# Altium PCB jlink072.PcbDoc
Units mm, origin at the board's own origin, x right, y up, seen from the top; angles counter-clockwise.
Board outline 41.1 x 18 mm, 2 copper layers (Top Layer, Bottom Layer), stack 1.571 mm thick; 26 components, 25 nets, 114 pads, 16 vias.
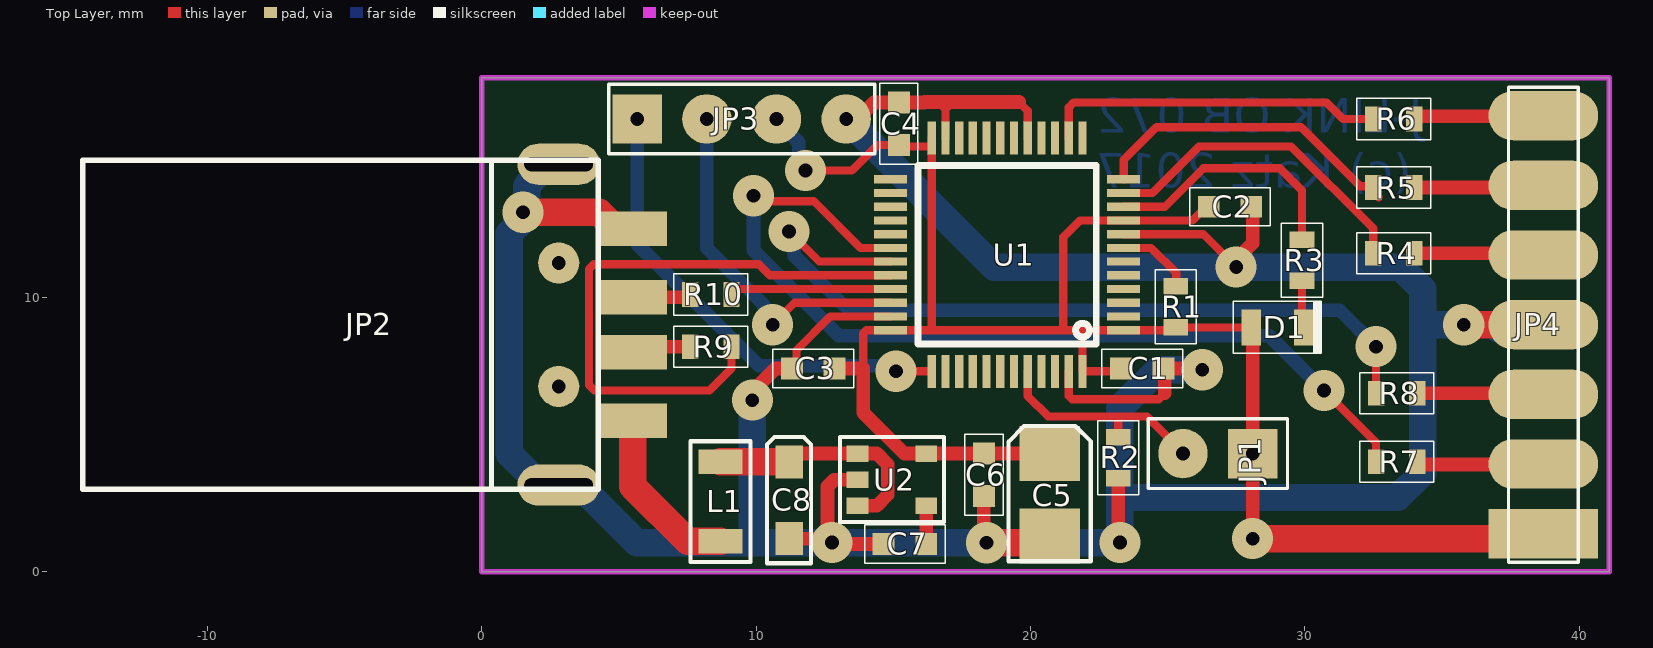
[diagram p0: Top Layer view]
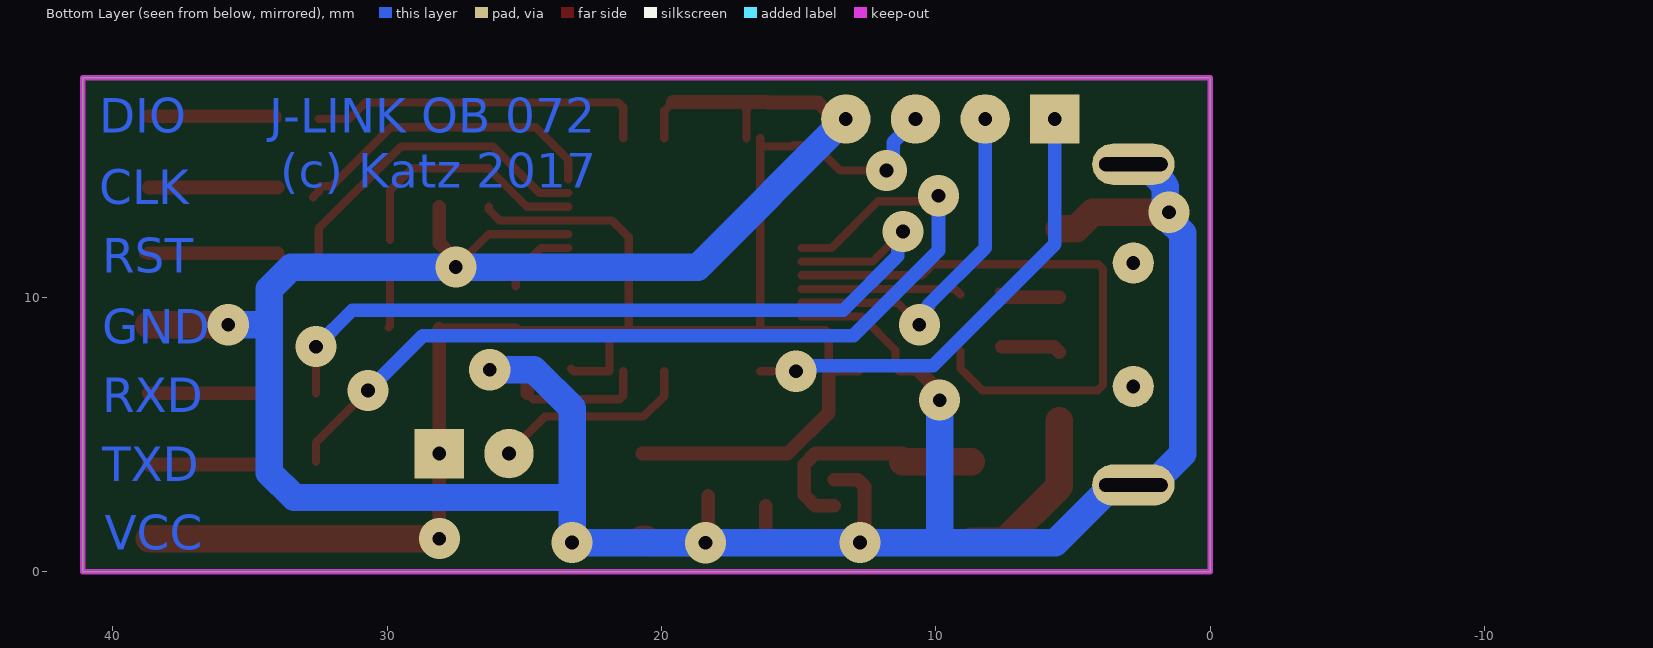
[diagram p1: Bottom Layer view, seen from below]
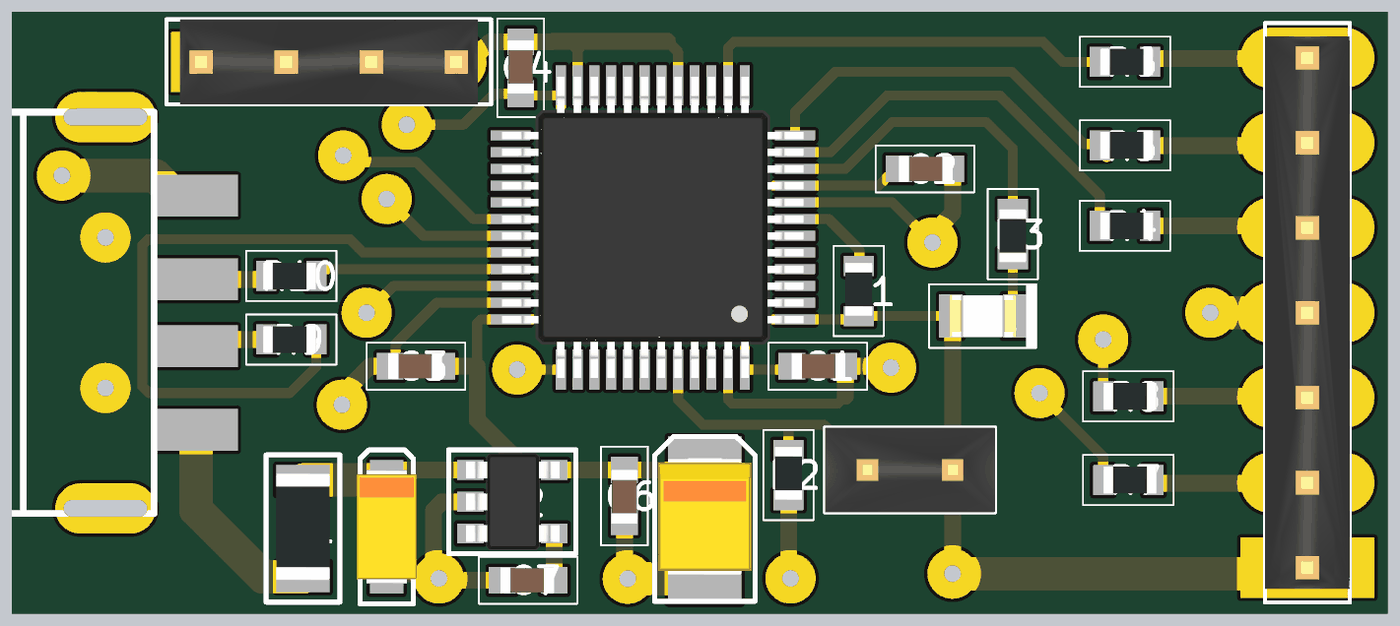
[diagram p2: 3D render of the assembled board from above, using the file's embedded part models]

## Layer stack, top to bottom
Top Solder: solder mask 0.0102, Solder Resist, Dk 3.5
Top Layer: signal copper 0.0356
Dielectric 1: dielectric 1.5, FR-4, Dk 4.8
Bottom Layer: signal copper 0.0356
Bottom Solder: solder mask 0.0102, Solder Resist, Dk 3.5

## Board outline
0,0 0,18 41.1,18 41.1,0

## Design rules (kind name [scope] priority, off if disabled: settings)
Clearance Clearance_2 [InNamedPolygon('GND_B') Or  InNamedPolygon('GND_T')] p1: gap=0.3 ignorepadtopadclearanceinfootprint=FALSE except(0: Arc-Hole Track-Hole SMDPad-Hole THPad-Hole Via-Hole Fill-Hole Poly-Hole Region-Hole Text-Hole)
Clearance Clearance_1 [InNamedPolygon('GND_T') vs InComponent('JP1')] p2: gap=0.5 ignorepadtopadclearanceinfootprint=FALSE except(0: Arc-Hole Track-Hole SMDPad-Hole THPad-Hole Via-Hole Fill-Hole Poly-Hole Region-Hole Text-Hole)
Clearance [All] p3: gap=0.2 ignorepadtopadclearanceinfootprint=FALSE except(0: Arc-Hole Track-Hole SMDPad-Hole THPad-Hole Via-Hole Fill-Hole Poly-Hole Region-Hole Text-Hole)
ComponentClearance [InComponent('JP3') vs InComponent('JP1')] p1: gap=-2 collisioncheckmode=3 verticalgap=-2 showdistances=FALSE
HoleSize [All] p1: absolutevalues=TRUE maxlimit=3 minlimit=0.025 maxpercent=80.000 minpercent=20.000
MinimumSolderMaskSliver [All] p1: minsoldermaskwidth=0
PolygonConnect PolygonConnect_1 [IsVia vs IsNamedPolygon('GND_T') Or  IsNamedPolygon('GND_B')] p1: connectstyle=Direct reliefconductorwidth=0.254 reliefentries=4 polygonreliefangle="90 Angle" airgapwidth=0.254
PolygonConnect [All] p2: connectstyle=Relief reliefconductorwidth=0.254 reliefentries=4 polygonreliefangle="90 Angle" airgapwidth=0.254
RoutingVias [All] p1: holewidth=0.5 width=1 viastyle="Through Hole" minholewidth=0.4 minwidth=0.9 maxholewidth=2.5 maxwidth=3
SilkToSilkClearance [All] p1: silktosilkclearance=0
SilkToSolderMaskClearance [IsPad] p1: minsilkscreentomaskgap=0 clearancetoexposedcopper=TRUE
SolderMaskExpansion SolderMaskExpansion_1 [All] p1: expansion=0.1 istentingtop=FALSE
SolderMaskExpansion [IsVia] p2: expansion=-0.15 istentingtop=FALSE
Width [All] p1: maxlimit=2 minlimit=0.2 preferedwidth=0.2
25 further rules are at their usual default settings.

## Components (designator, comment, footprint, x,y, rotation, side; value= is the part's Value field where it differs from the comment)
C1 "100nF" C-0603 23.3,7.4 r0 top
C2 "100nF" C-0603 26.5,13.3 r0 top
C3 "100nF" C-0603 12.85,7.4 r180 top
C4 "100nF" C-0603 15.2,15.55 r90 top
C5 "33uF 6V" TANTAL-B 20.7,1.3 r90 top
C6 "100nF" C-0603 18.3,4.3 r270 top
C7 "nc" C-0603 16.2,1 r180 top
C8 "10uF 6V" TANTAL-A 11.2,1.2 r90 top
D1 "LED" LED-0805 29,8.9 r180 top
JP1 "HEADER 2" PLS1-2 28.1,4.3 r180 top
JP2 "USB_conn" USB_A_M_SMD 5.5,9 r90 top locked
JP3 "Header 4" PLS1-4 5.66,16.5 r0 top
JP4 "HEADER7" PLS1-7 38.7,1.38 r90 top
L1 "SUPRESOR" R-1206 8.7,4 r270 top
R1 "10k" R-0603 25.3,8.9 r90 top
R2 "10k" R-0603 23.2,3.4 r90 top
R3 "1k" R-0603 29.9,12.1 r270 top
R4 "100R" R-0603 32.5,11.6 r0 top
R5 "100R" R-0603 32.5,14 r0 top
R6 "100R" R-0603 32.5,16.5 r0 top
R7 "100R" R-0603 32.6,4 r0 top
R8 "100R" R-0603 32.6,6.5 r0 top
R9 "0" R-0603 9.1,8.2 r180 top
R10 "0" R-0603 9.1,10.1 r180 top
U1 "STM32F072C8T6" LQFP48 23.4,14.3 r180 top locked
U2 "LP2981-3.3" SOT-23-5 13.7,4.3 r90 top

## Footprints (in the part's own frame and the unit in brackets; to place one, negate y for a bottom-side part, rotate by r counter-clockwise, add the part's x,y. Pads: shape width x height; smd on the part's side, far side on the other; paste and mask are expansions set on the pad)
C-0603 [mm]
  rect 0.8x0.8 smd: 1(0,0) 2(1.55,0)
  silkscreen extent -0.7,-0.7 2.25,0.7, body extent 0,-0.4 1.6,0.4, height 0.8
LED-0805 [mm]
  rect 0.7x1.3 smd: A(0.95,0) K(-0.95,0)
  silkscreen extent -1.6,-0.95 1.6,0.95, body extent -1,-0.63 1,0.63, height 1.1
LQFP48 [mm] "48 pins 0.5 pitch"
  rect 1.2x0.3 smd: 1(0,5.5) 2(0,5) 3(0,4.5) 4(0,4) 5(0,3.5) 6(0,3) 7(0,2.5) 8(0,2) 9(0,1.5) 10(0,1) 11(0,0.5) 12(0,0) 25(8.5,0) 26(8.5,0.5) 27(8.5,1) 28(8.5,1.5) 29(8.5,2) 30(8.5,2.5) 31(8.5,3) 32(8.5,3.5) 33(8.5,4) 34(8.5,4.5) 35(8.5,5) 36(8.5,5.5)
  rect 0.3x1.2 smd: 13(1.5,-1.5) 14(2,-1.5) 15(2.5,-1.5) 16(3,-1.5) 17(3.5,-1.5) 18(4,-1.5) 19(4.5,-1.5) 20(5,-1.5) 21(5.5,-1.5) 22(6,-1.5) 23(6.5,-1.5) 24(7,-1.5) 37(7,7) 38(6.5,7) 39(6,7) 40(5.5,7) 41(5,7) 42(4.5,7) 43(4,7) 44(3.5,7) 45(3,7) 46(2.5,7) 47(2,7) 48(1.5,7)
  silkscreen extent 1,-0.5 7.5,6, body extent -0.25,-1.75 8.75,7.25, height 1.5
PLS1-2 [mm] "Header, Vertical, 2.54 mm pitch; 0.64 mm lead width, 2 pins, 1 row, 2 pins per row, 5.08 mm L X 2.54 mm W X 8.54 mm H body"
  rect 1.8x1.8 hole 0.5 paste-1.59: 1(0,0)
  round 1.8 hole 0.5 paste-1.59: 2(2.54,0)
  silkscreen extent -1.27,-1.27 3.81,1.27, body extent -1.27,-1.27 3.81,1.27, height 8.54
PLS1-4 [mm] "Header, Vertical, 2.54 mm pitch; 0.70 mm lead width, 4 pins, 1 row, 4 pins per row, 8.89 mm L X 2.54 mm W X 7.54 mm H body"
  rect 1.8x1.8 hole 0.5 paste-1.71: 1(0,0)
  round 1.8 hole 0.5 paste-1.71: 2(2.54,0) 3(5.08,0) 4(7.62,0)
  silkscreen extent -1.04,-1.27 8.66,1.27, body extent -0.64,-1.27 8.25,1.27, height 7.54
PLS1-7 [mm] "Header, Vertical, 2.54 mm pitch; 0.70 mm lead width, 7 pins, 1 row, 7 pins per row, 16.51 mm L X 2.54 mm W X 7.54 mm H body"
  rect 1.8x4 smd paste-1.71: 1(0,0)
  oval 1.8x4 smd paste-1.71: 2(2.54,0) 3(5.08,0) 4(7.62,0) 5(10.16,0) 6(12.7,0) 7(15.24,0)
  silkscreen extent -1.04,-1.27 16.28,1.27, body extent -0.64,-1.27 15.88,1.27, height 7.54
R-0603 [mm]
  rect 0.6x0.9 smd: 1(0,0) 2(1.5,0)
  silkscreen extent -0.6,-0.75 2.1,0.75, body extent 0,-0.4 1.6,0.4, height 0.45
R-1206 [mm]
  rect 0.9x1.6 smd: 1(0,0) 2(2.9,0)
  silkscreen extent -0.75,-1.1 3.65,1.1, body extent -0.2,-0.8 3,0.8, height 0.55
SOT-23-5 [mm]
  rect 0.6x0.8 smd: 1(0,0) 2(-0.95,0) 3(-1.9,0) 4(-1.9,-2.5) 5(0,-2.5)
  silkscreen extent -2.5,-3.15 0.6,0.65, body extent -2.4,-2.67 0.5,0.13, height 1.55
TANTAL-A [mm]
  rect 1.2x1 smd: 1(0,0) 2(2.8,0)
  silkscreen extent -0.9,-0.8 3.7,0.8, body extent -0.3,-0.9 3.1,0.9, height 1.2
TANTAL-B [mm]
  rect 2x2.2 smd: 1(0,0) 2(3,0)
  silkscreen extent -0.92,-1.5 4,1.5, body extent -0.15,-1.4 3.35,1.4, height 2.1
USB_A_M_SMD [mm] "usb male smd mount"
  oval 1.5x3 hole 0.5 slot 2.5 at 90 deg: 0(-5.85,2.7) 0(5.85,2.7)
  round 1.5 hole 0.5 unplated mask+0: 0(-2.25,2.7) 0(2.25,2.7)
  rect 1.25x2.5 smd: 1(-3.5,0) 2(-1,0) 3(1,0) 4(3.5,0)
  silkscreen extent -6,1.25 6,20.05

## Part data
C1 C2 C3 C4 C6 C7: library part CAPN, Part Field 1=Hitano, Part Field 7=10%, Part Field 8=50V, Part Field 9=X7R
C5 C8: library part CAPP
JP2: "USB_connector"
JP3: "Header, 4-Pin", LatestRevisionDate=17-Jul-2002, LatestRevisionNote="Re-released for DXP Platform.", Publisher="Altium Limited"
R1 R2 R3 R4 R5 R6 R7 R8 R9 R10: library part RES, Part Field 1=UniOhm, Part Field 7=5%
JP1 JP4: Вид=Роз'єм

## Via types
v1: diameter 1.5, hole 0.5, Top Layer to Bottom Layer, 16 vias

## Nets (pads, with @x,y where several pads share a name; then routed paths per layer and width w, separated by ;. In a path a pad name is that pad's centre, name@x,y a point inside that pad or via, vN(x,y) a via of type N, cw(c..) or ccw(c..) an arc to the next point about the centre after c; other vN are vias at no path point)
BOOT0: JP1.2 R2.2 U1.44 | length 8.3
  Top Layer w0.3: U1.44 19.9,6.4 20.65,5.65 23.15,5.65 ; R2.2 23.2,5.6 23.15,5.65 ; JP1.2@25.5,4.2 25.5,4.4 24.25,5.65 23.15,5.65
DM: JP2.2 R9.2 | length 2.2
  Top Layer w0.5: JP2.2 5.7,8.2 R9.2
DP: JP2.3 R10.2 | length 2.3
  Top Layer w0.3: R10.2@7.5,10 R10.2@7.7,10.2
  Top Layer w0.5: JP2.3 R10.2@7.5,10
GND: C1.2 C2.2 C3.2 C4.2 C5.1 C6.2 C7.2 C8.1 JP2.0@2.8,3.15 JP2.0@2.8,14.85 JP2.4 JP3.4 JP4.4 R2.1 U1.8 U1.17 U1.23 U1.35 U1.47 U2.2 | length 141.3
  Top Layer w0.3: C3.2 11.468,7.568 11.468,8.068 12.7,9.3 U1.35 ; U1.23 16.9,17 ; 19.583,17.117 19.9,16.8 U1.17 ; U1.47 21.4,6.4 21.517,6.283 24.683,6.283 24.9,6.5 ; U1.8 26.3,12.3 v1(27.5,11.1)
  Top Layer w0.5: v1(9.862,6.25) 9.862,6.562 10.7,7.4 C3.2 ; C8.1 12.6,1.2 12.6,3.1 12.85,3.35 U2.2 ; v1(12.762,1.057) 12.819,1 C7.2 ; JP3.4 13.689,16.5 14.289,17.1 C4.2 16.133,17.1 16.15,17.117 16.783,17.117 ; 16.9,17 16.783,17.117 ; C6.2 18.3,1.15 v1(18.4,1.05) ; 19.583,17.117 16.783,17.117 ; C5.1@20.45,1.05 C5.1@20.575,1.175 ; v1@23.2,1.5 R2.1 ; 24.9,6.5 24.9,7.35 C1.2 v1@26.2,7.4 ; v1(27.5,11.1) 27.5,11.371 28.1,11.971 C2.2@28.1,13.3
  Top Layer w1: v1(1.5,13.1) 4.275,13.1 4.875,12.5 JP2.4 ; v1@18.45,1.05 C5.1@20.45,1.05 ; C5.1@20.575,1.175 C5.1@20.7,1.175 ; v1(35.8,9) JP4.4
  Bottom Layer w0.2: v1(18.4,1.05) v1@18.403,1.054 ; v1@23.258,1.054 v1(23.262,1.057)
  Bottom Layer w1: v1@1.5,12.833 1,12.333 1,4.301 2.151,3.15 2.8,3.15 3.55,3.15 5.643,1.057 9.862,1.057 ; v1(1.5,13.1) 1.632,13.232 1.632,14.033 1.707,14.108 1.707,14.155 2.402,14.85 JP2.0@2.8,14.85 ; v1(9.862,6.25) 9.862,1.057 ; JP3.4 18.68,11.1 v1(27.5,11.1) 33.5,11.1 34.3,10.3 34.3,9 ; v1(18.4,1.05) 18.393,1.057 v1(12.762,1.057) 9.862,1.057 ; v1@18.403,1.054 v1@23.258,1.054 ; v1(23.262,1.057) 23.262,2.7 ; v1(26.262,7.357) 24.657,7.357 23.262,5.962 23.262,2.7 ; v1(35.8,9) 34.3,9 ; 23.262,2.7 33.4,2.7 34.3,3.6 34.3,9
NetC7_1: C7.1 U2.4 | length 1.4
  Top Layer w0.5: C7.1 U2.4
NetC8_2: C8.2 L1.1 U2.1 U2.3 | length 8.6
  Top Layer w0.5: C8.2@11.2,4.3 U2.1 14.4,4.3 14.8,3.9 14.8,2.8 14.4,2.4 U2.3
  Top Layer w1: L1.1 C8.2
NetD1_K: D1.K R3.2 | length 1.7
  Top Layer w0.3: R3.2 29.9,8.95 D1.K
NetJP2_1: JP2.1 L1.2 | length 6.4
  Top Layer w1: JP2.1 5.5,3.1 7.5,1.1 L1.2
NetR1_2: R1.2 U1.7 | length 2.8
  Top Layer w0.3: U1.7 24.4,11.8 25.317,10.883 R1.2@25.317,10.4
NetR3_1: R3.1 U1.10 | length 9.2
  Top Layer w0.3: U1.10 24.9,13.3 26.3,14.7 29.1,14.7 29.9,13.9 R3.1
NetR4_1: R4.1 U1.11 | length 11.9
  Top Layer w0.3: U1.11 24.45,13.8 26.15,15.5 29.5,15.5 32.5,12.5 R4.1
NetR5_1: R5.1 U1.12 | length 11.5
  Top Layer w0.3: U1.12 23.4,15 24.6,16.2 29.866,16.2 32.017,14.049 32.451,14.049 R5.1 ; R5.1@32.5,13.85 R5.1@32.7,13.65
NetR6_1: R6.1 U1.14 | length 12.5
  Top Layer w0.3: U1.14 21.4,16.924 21.576,17.1 30.8,17.1 31.4,16.5 R6.1
NetR7_1: R7.1 U1.30 | length 34.1
  Top Layer w0.3: v1(9.9,13.7) 10.1,13.5 12.1,13.5 13.8,11.8 U1.30 ; v1(30.7,6.6) 32.6,4.7 R7.1
  Bottom Layer w0.5: v1(9.9,13.7) 9.9,11.7 13,8.6 28.7,8.6 v1(30.7,6.6)
NetR8_1: R8.1 U1.31 | length 29.4
  Top Layer w0.3: v1(11.2,12.4) 12.3,11.3 U1.31 ; R8.1 v1(32.6,8.2)
  Bottom Layer w0.5: v1(11.2,12.4) 11.392,12.208 11.392,11.508 13.374,9.526 31.274,9.526 v1(32.6,8.2)
NetR9_1: R9.1 U1.32 | length 21.7
  Top Layer w0.3: R9.1@9.1,8.042 9.1,7.4 8.3,6.6 4.1,6.6 3.9,6.8 3.9,11.024 4.076,11.2 10.1,11.2 10.5,10.8 U1.32
NetR10_1: R10.1 U1.33 | length 5.9
  Top Layer w0.3: R10.1 9.3,10.3 U1.33
RXD: JP4.3 R8.2 | length 4.6
  Top Layer w0.5: R8.2 JP4.3@38.7,6.5
SWCLK: JP3.1 U1.37 | length 17.2
  Top Layer w0.3: v1(15.1,7.3) U1.37
  Bottom Layer w0.5: JP3.1 5.66,11.94 10.1,7.5 14.9,7.5 v1(15.1,7.3)
SWDIO: JP3.2 U1.34 | length 13.6
  Top Layer w0.3: v1@10.717,9.417 10.6,9.3 10.6,9.217 v1(10.6,9) 11.4,9.8 U1.34
  Bottom Layer w0.5: JP3.2 8.2,11.8 10.258,9.742 10.258,9.694 10.6,9.352 v1(10.6,9)
T_RST: JP4.5 R4.2 | length 4.7
  Top Layer w0.3: JP4.5@38.89,11.57 JP4.5@38.9,11.58
  Top Layer w0.5: R4.2 JP4.5@38.7,11.6
T_SWCLK: JP4.6 R5.2 | length 4.7
  Top Layer w0.5: R5.2 JP4.6@38.7,14
T_SWDIO: JP4.7 R6.2 | length 4.7
  Top Layer w0.3: R6.2 R6.2@34.1,16.6
  Top Layer w0.5: R6.2@34.1,16.6 JP4.7@38.7,16.6
TXD: JP4.2 R7.2 | length 4.6
  Top Layer w0.3: R7.2 R7.2@34.2,3.9
  Top Layer w0.5: R7.2@34.2,3.9 JP4.2@38.7,3.9
VCC: C1.1 C2.1 C3.1 C4.1 C5.2 C6.1 D1.A JP1.1 JP3.3 JP4.1 R1.1 U1.1 U1.9 U1.24 U1.36 U1.48 U2.5 | length 70.2
  Top Layer w0.3: v1(11.8,14.621) 13.488,14.621 14.418,15.55 C4.1 15.25,15.5 U1.24@16.4,15.5 ; 13.9,7.4 13.9,8.683 14.017,8.8 U1.36 16.4,8.8 ; U1.24 U1.24@16.4,15.5 ; C1.1 23.2,7.3 U1.48 21.9,8.7 21.8,8.8 ; C2.1@26.3,13.3 26.3,13.2 25.9,12.8 U1.9 21.8,12.8 21.2,12.2 21.2,8.8 ; D1.A@28.1,8.85 D1.A R1.1 25.2,8.8 U1.1 21.8,8.8 ; 16.4,8.8 U1.24@16.4,15.5 ; 16.4,8.8 21.2,8.8 ; 21.2,8.8 21.8,8.8
  Top Layer w0.5: C3.1 13.9,7.4 13.9,5.8 15.4,4.3 U2.5 C6.1 C5.2 ; v1(28.1,1.2) JP1.1 D1.A@28.1,8.85
  Top Layer w1: v1(28.1,1.2) JP4.1@38.68,1.2
  Bottom Layer w0.5: JP3.3 10.74,16.462 11.556,15.646 11.556,14.865 v1(11.8,14.621)
pads on no net: JP2.0@2.8,6.75 JP2.0@2.8,11.25 U1.2 U1.3 U1.4 U1.5 U1.6 U1.13 U1.15 U1.16 U1.18 U1.19 U1.20 U1.21 U1.22 U1.25 U1.26 U1.27 U1.28 U1.29 U1.38 U1.39 U1.40 U1.41 U1.42 U1.43 U1.45 U1.46

## Keep-outs
Keep-Out Layer:
  the board outline again, w0.2

## Other copper
Bottom Layer:
  text "J-LINK OB 072" at 34.3,16 h1.25
  text "DIO" at 40.5,16 h1.25
  text "(c) Katz 2017" at 33.9,14 h1.25
  text "CLK" at 40.5,13.4 h1.25
  text "RST" at 40.4,10.9 h1.25
  text "GND" at 40.4,8.3 h1.25
  text "RXD" at 40.4,5.8 h1.25
  text "TXD" at 40.4,3.3 h1.25
  text "VCC" at 40.3,0.8 h1.25

## Dimensions
0,0 to 0,18 on Mechanical 1
0.1,-0.2 to 41.1,0 on Mechanical 1